# EAGLE board mosfet_smt_test (EAGLE 9.4.0)
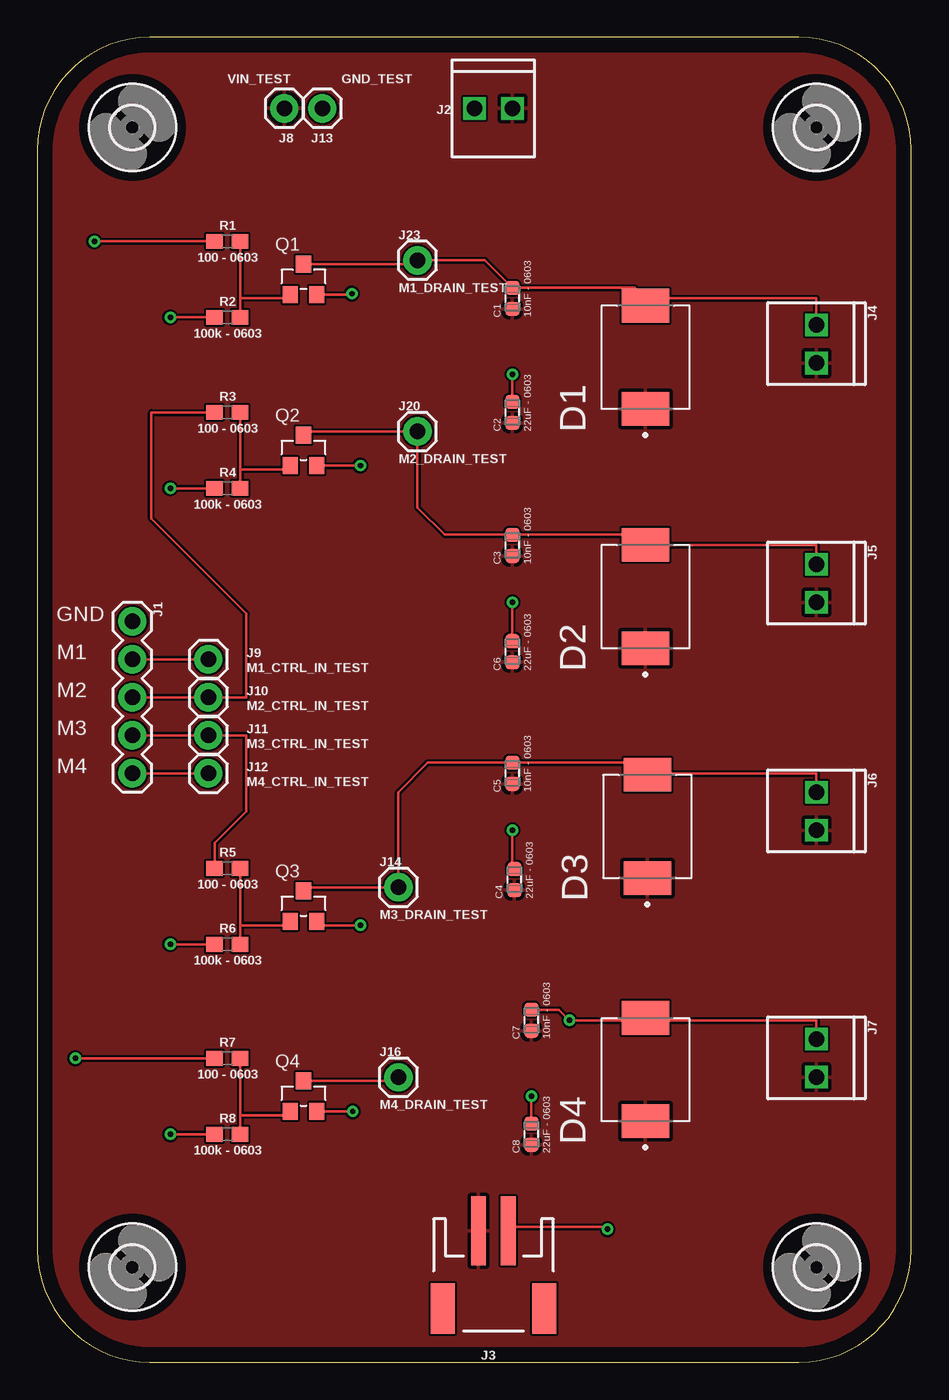
[diagram p0: board, top side]
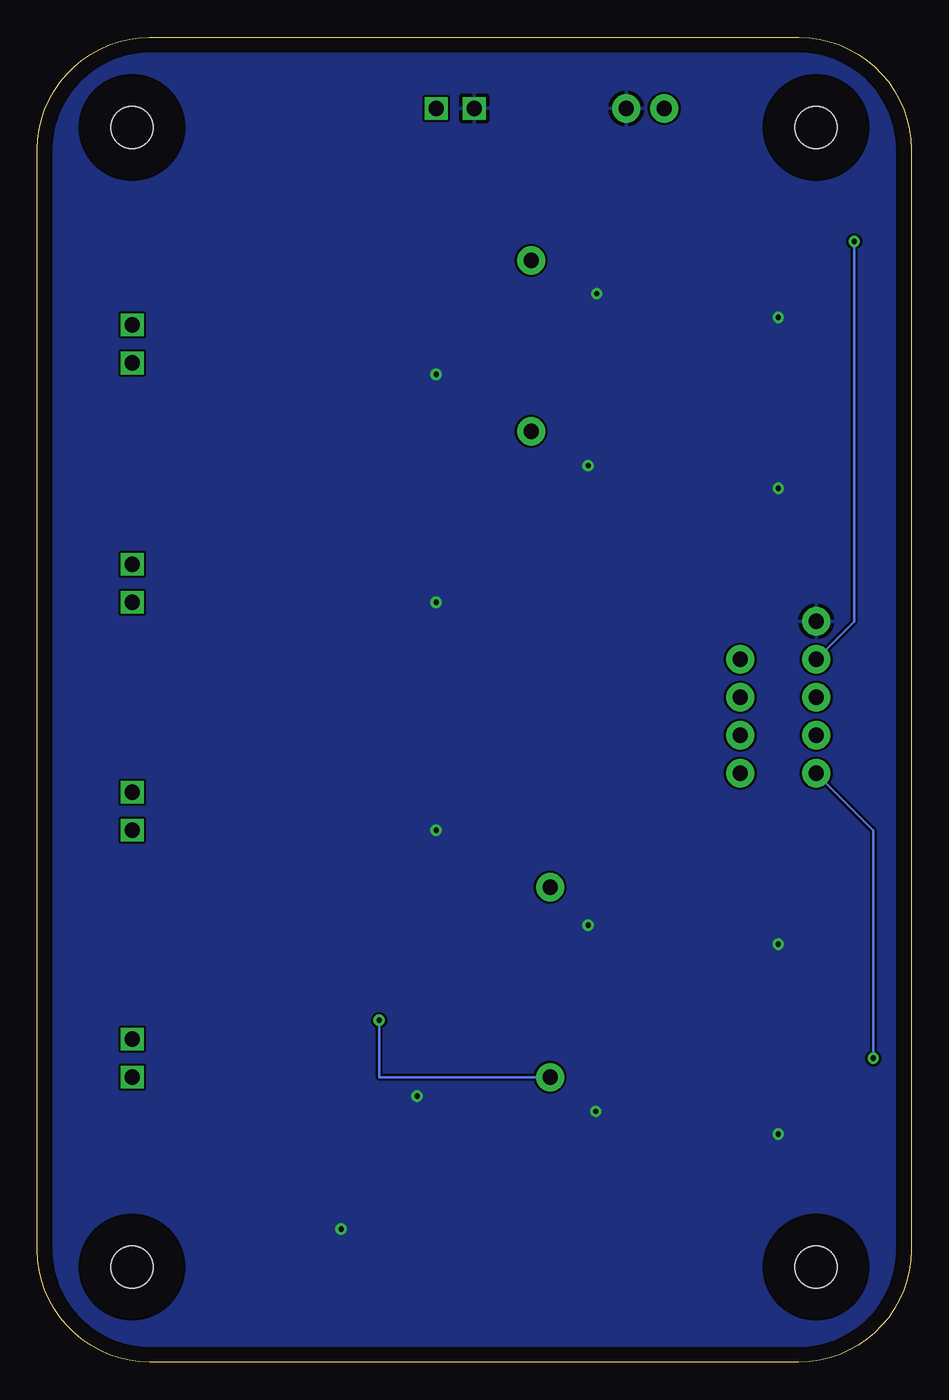
[diagram p1: board, bottom side, seen from below]

Size 58.4 x 88.57 mm. Coordinates in mm from the lower left corner, seen from the top.
Outline: 0,81.07 0,7.5 arc90 7.5,0 50.9,0 arc90 58.4,7.5 58.4,81.07 arc90 50.9,88.57 7.5,88.57 arc90 0,81.07
Copper layers (1*16): Top 0.035mm / dielectric 1.5mm / Bottom 0.035mm
Design rules "default": minimum track width 6mil, minimum drill 0.35mm, track to track 6mil, track to pad 6mil, pad to pad 6mil, via to via 6mil, smd to smd 6mil, copper to edge 40mil, drill to drill 6mil, minimum pad ring 10mil, minimum via ring 8mil, stop-mask expansion 4mil, vias tented up to drill 0mil, thermal gap 10mil

## Footprints (pad centres in the part's own frame; a part is rotated, then mirrored left to right if it is on the bottom)
CAP_0603 = smd 0.92 x 0.93: 1 -0.705,0; 2 0.705,0
DIOM7959X265N = smd 2.25 x 3.18: A 3.455,0; C -3.455,0
2,8 = hole 2.8: 0,0
1X05 = drill 1.016 pad 1.88: 1 0,0; 2 2.54,0; 3 5.08,0; 4 7.62,0; 5 10.16,0
1X02_2.54_SCREWTERM = drill 1.016 square: P1 2.54,0; P2 0,0
JST-2-SMD = smd 1 x 4.6: 1 -1,-3.7; 2 1,-3.7 | smd 1.6 x 3.4: NC1 -3.4,1.5; NC2 3.4,1.5
1X01 = drill 1.016 pad 1.88: 1 0,0
SOT-23 = smd 1.016 x 1.143: 1 -0.889,-1.016; 2 0.889,-1.016; 3 0,1.016
0603 = smd 1.1 x 1: 1 -0.85,0; 2 0.85,0

## Placement (x,y rotation side)
C1  10nF - 0603  [CAP_0603]  31.75,71.12 90 top
C2  22uF - 0603  [CAP_0603]  31.75,63.5 90 top
C3  10nF - 0603  [CAP_0603]  31.75,54.61 90 top
C4  22uF - 0603  [CAP_0603]  31.88,32.26 90 top
C5  10nF - 0603  [CAP_0603]  31.75,39.37 90 top
C6  22uF - 0603  [CAP_0603]  31.75,47.5 90 top
C7  10nF - 0603  [CAP_0603]  33.02,22.86 90 top
C8  22uF - 0603  [CAP_0603]  33.02,15.24 90 top
D1  SS34  [DIOM7959X265N]  40.64,67.18 90 top
D2  SS34  [DIOM7959X265N]  40.64,51.18 90 top
D3  SS34  [DIOM7959X265N]  40.77,35.81 90 top
D4  SS34  [DIOM7959X265N]  40.64,19.56 90 top
H1  MOUNT-HOLE2.8  [2,8]  52.07,82.55 0 top
H2  MOUNT-HOLE2.8  [2,8]  6.35,82.55 0 top
H3  MOUNT-HOLE2.8  [2,8]  52.07,6.35 0 top
H4  MOUNT-HOLE2.8  [2,8]  6.35,6.35 0 top
J1  [1X05]  6.35,49.53 270 top
J2  [1X02_2.54_SCREWTERM]  29.21,83.82 0 top
J3  [JST-2-SMD]  30.48,5.08 180 top
J4  [1X02_2.54_SCREWTERM]  52.07,69.34 270 top
J5  [1X02_2.54_SCREWTERM]  52.07,53.34 270 top
J6  [1X02_2.54_SCREWTERM]  52.07,38.1 270 top
J7  [1X02_2.54_SCREWTERM]  52.07,21.59 270 top
J8  VIN_TEST  [1X01]  16.51,83.82 0 top
J9  M1_CTRL_IN_TEST  [1X01]  11.43,46.99 0 top
J10  M2_CTRL_IN_TEST  [1X01]  11.43,44.45 0 top
J11  M3_CTRL_IN_TEST  [1X01]  11.43,41.91 0 top
J12  M4_CTRL_IN_TEST  [1X01]  11.43,39.37 0 top
J13  GND_TEST  [1X01]  19.05,83.82 0 top
J14  M3_DRAIN_TEST  [1X01]  24.13,31.75 0 top
J16  M4_DRAIN_TEST  [1X01]  24.13,19.05 0 top
J20  M2_DRAIN_TEST  [1X01]  25.4,62.23 0 top
J23  M1_DRAIN_TEST  [1X01]  25.4,73.66 0 top
Q1  CJ2302  [SOT-23]  17.78,72.39 0 top
Q2  CJ2302  [SOT-23]  17.78,60.96 0 top
Q3  CJ2302  [SOT-23]  17.78,30.48 0 top
Q4  CJ2302  [SOT-23]  17.78,17.78 0 top
R1  100 - 0603  [0603]  12.7,74.93 0 top
R2  100k - 0603  [0603]  12.7,69.85 0 top
R3  100 - 0603  [0603]  12.7,63.5 0 top
R4  100k - 0603  [0603]  12.7,58.42 0 top
R5  100 - 0603  [0603]  12.7,33.02 0 top
R6  100k - 0603  [0603]  12.7,27.94 0 top
R7  100 - 0603  [0603]  12.7,20.32 0 top
R8  100k - 0603  [0603]  12.7,15.24 0 top

## Library data of the parts
C1-C8 = Resistor_Capacitor; CREATED_BY: PCBLayout.com; DIGIKEY_PART_NUMBER: 311-1049-2-ND; MANUFACTURER: Yageo; MPN: CC0603CRNPO9BN1R0; PACKAGE: SMD 0603
D1-D4 = SS34; AVAILABILITY: Good; DESCRIPTION: Diode Schottky 40V 3A Surface Mount SMC (DO-214AB); MF: ON Semiconductor; MP: SS34; PACKAGE: SMC-2 ON Semiconductor; PRICE: None; PURCHASE-URL: https://pricing.snapeda.com/search/part/SS34/?ref=eda
H1-H4 = holes
J1 J2 J4-J14 J16 J20 J23 = SparkFun-Connectors
J3 = SparkFun-Connectors; PROD_ID: CONN-11443; SF_ID: PRT-08612
Q1-Q4 = OPL_Discrete_Semiconductor; MPN: CJ2302
R1-R8 = SparkFun-Resistors; PROD_ID: RES-08609

## Nets
GND: C2.2 C4.2 C6.2 C8.2 J1.1 J2.P2 J3.1 J13.1 Q1.2 Q2.2 Q3.2 Q4.2 R2.1 R4.1 R6.1 R8.1
M1_CTRL_IN: J1.2 J9.1 R1.1
M2_CTRL_IN: J1.3 J10.1 R3.1
M3_CTRL_IN: J1.4 J11.1 R5.1
M4_CTRL_IN: J1.5 J12.1 R7.1
N$1: Q1.1 R1.2 R2.2
N$2: C1.2 D1.A J4.P2 J23.1 Q1.3
N$3: Q2.1 R3.2 R4.2
N$4: C3.2 D2.A J5.P2 J20.1 Q2.3
N$5: Q3.1 R5.2 R6.2
N$6: C5.2 D3.A J6.P2 J14.1 Q3.3
N$7: Q4.1 R7.2 R8.2
N$8: C7.2 D4.A J7.P2 J16.1 Q4.3
VIN: C1.1 C2.1 C3.1 C4.1 C5.1 C6.1 C7.1 C8.1 D1.C D2.C D3.C D4.C J2.P1 J3.2 J4.P1 J5.P1 J6.P1 J7.P1 J8.1

## Tracks (layer width: path | path; a pad name or v marks a point on that pad's centre or on a via)
GND  (via drill 0.35)
  Top 0.152: R8.1 v8.89,15.24 | Q4.2 v21.08,16.76 | Q1.2 20.83,71.37 20.95,71.5 v21.02,71.44 | R2.1 v8.89,69.85 | R4.1 v8.89,58.42 | C8.2 v33.02,17.78 | Q3.2 18.92,29.21 v21.59,29.21 | R6.1 v8.89,27.94 | C2.2 v31.75,66.04 | J3.1 31.75,9.05 37.94,9.05 v38.1,8.89 | Q2.2 v21.59,59.94 | C4.2 31.75,33.09 v31.75,35.56 | C6.2 v31.75,50.8
  pour Bottom: -1.27,88.9 -1.27,0 59.69,0 59.69,88.9
M1_CTRL_IN  (via drill 0.35)
  Top 0.152: J9.1 J1.2 | v3.81,74.93 R1.1
  Bottom 0.152: J1.2 3.81,49.53 v3.81,74.93
M2_CTRL_IN
  Top 0.152: J1.3 J10.1 13.97,44.45 13.97,50.04 7.62,56.39 7.62,63.5 R3.1
M3_CTRL_IN
  Top 0.152: J1.4 J11.1 13.97,41.91 13.97,36.83 11.85,34.71 R5.1
M4_CTRL_IN  (via drill 0.35)
  Top 0.152: J12.1 J1.5 | v2.54,20.32 R7.1
  Bottom 0.152: J1.5 2.54,35.56 v2.54,20.32
N$1
  Top 0.152: R1.2 13.55,71.12 | 13.55,71.12 R2.2 | Q1.1 16.64,71.12 13.55,71.12
N$2
  Top 0.152: Q1.3 25.15,73.41 J23.1 29.91,73.66 C1.2 39.94,71.83 40.88,70.88 | J4.P2 52.04,69.37 52.07,69.39 52.07,71.12 41.12,71.12 40.88,70.88 | D1.A 40.88,70.88
N$3
  Top 0.152: R3.2 13.55,59.69 | 13.55,59.69 R4.2 | Q2.1 16.64,59.69 13.55,59.69
N$4
  Top 0.152: Q2.3 18.03,62.23 J20.1 25.4,57.15 27.23,55.31 C3.2 39.96,55.31 D2.A | D2.A 40.67,54.61 | D2.A 52.04,54.64 52.07,54.61 J5.P2
N$5
  Top 0.152: R5.2 13.55,29.21 | 13.55,29.21 R6.2 | Q3.1 16.64,29.21 13.55,29.21
N$6
  Top 0.152: Q3.3 18.03,31.75 J14.1 24.13,38.1 26.11,40.08 C5.2 40.16,40.08 40.87,39.37 | 51.97,38 J6.P2 52.07,39.37 40.87,39.37 | 40.67,39.37 D3.A 40.87,39.37
N$7
  Top 0.152: R7.2 13.55,16.51 | 13.55,16.51 R8.2 | Q4.1 16.64,16.51 13.55,16.51
N$8  (via drill 0.35)
  Top 0.152: Q4.3 23.88,18.8 J16.1 | 33.08,23.62 C7.2 34.85,23.57 v35.56,22.86 40.79,22.86 | D4.A 40.79,22.86 | 40.79,22.86 52.07,22.86 J7.P2
  Bottom 0.152: J16.1 35.56,19.05 v35.56,22.86
VIN
  pour Top: 0,88.9 0,3.07 arc45 1.27,0 58.42,0 58.42,88.9

## Text on the board
tNames: GND | M1 | M2 | M3 | M4
200bmp: C:/Users/cbaro/OneDrive/Pictures/picodrone.bmp